# EAGLE board top (EAGLE 6.5.0)
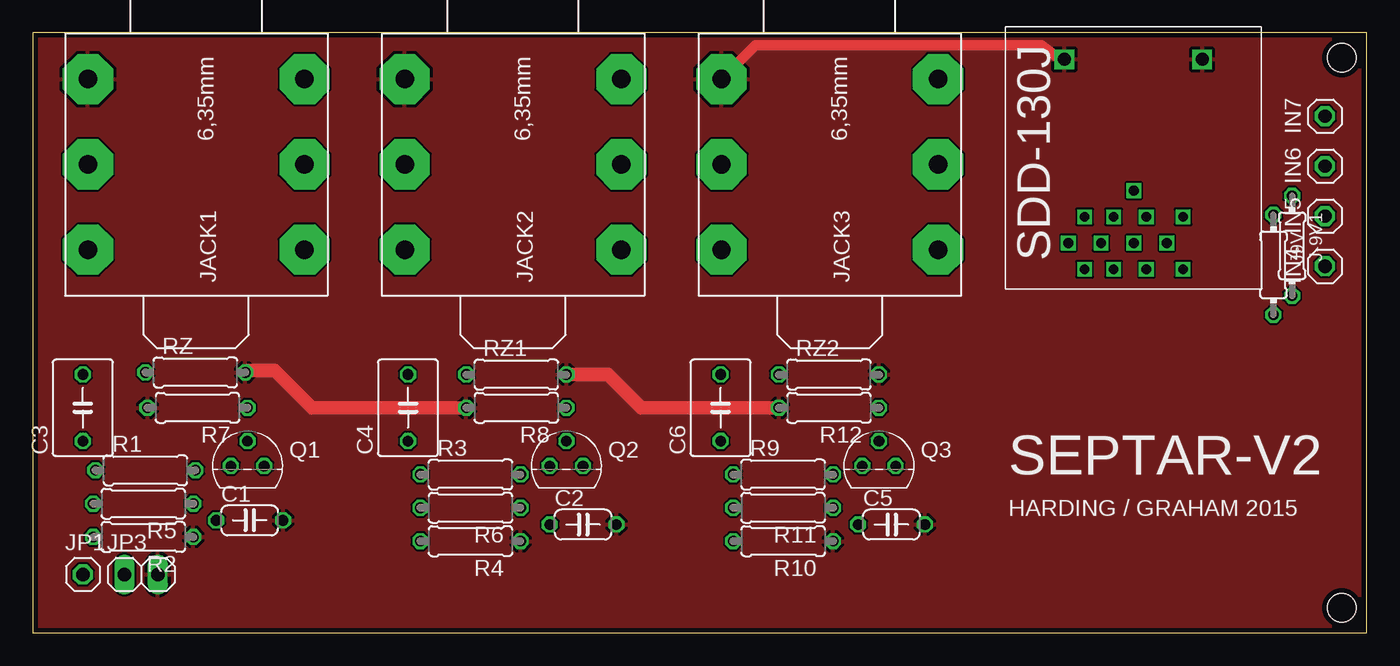
[diagram p0: board, top side]
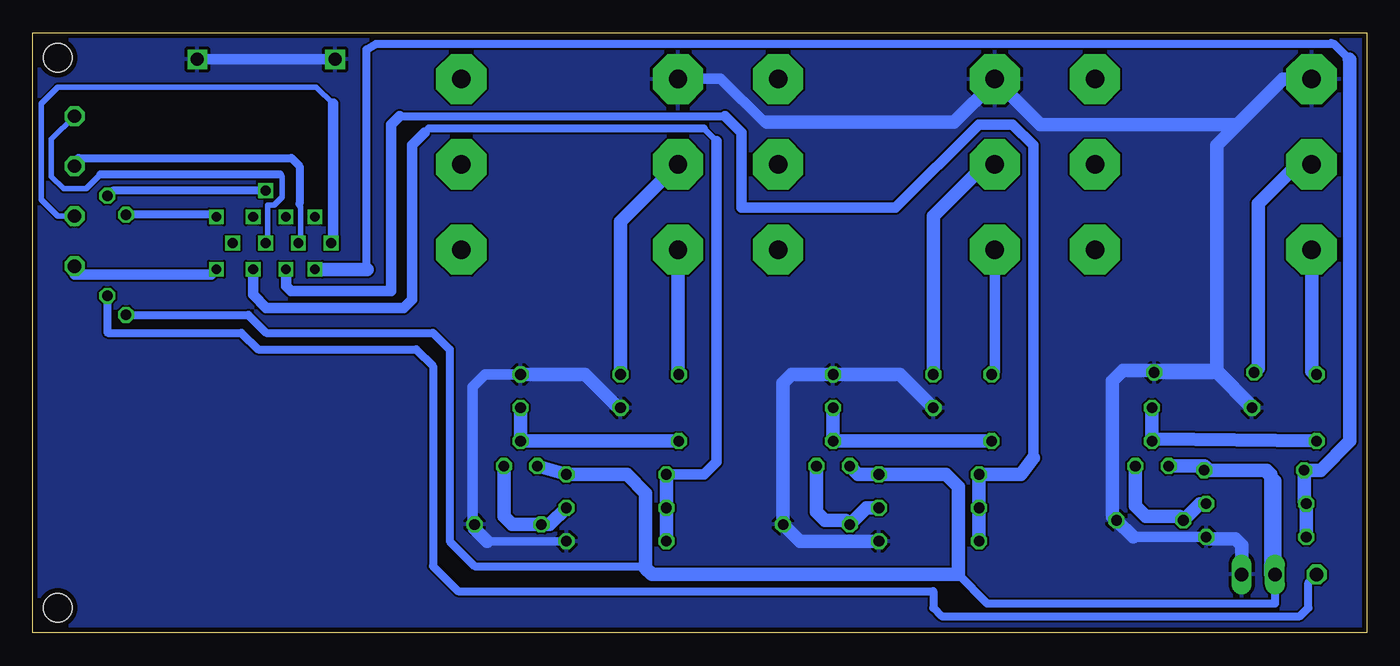
[diagram p1: board, bottom side, seen from below]

Size 101.6 x 45.72 mm. Coordinates in mm from the lower left corner, seen from the top.
Outline: 0,0 101.6,0 101.6,45.72 0,45.72 0,0
Copper layers (1*16): Top 0.0356mm / dielectric 1.5011mm / Bottom 0.0356mm
Design rules "OSHpark": minimum track width 6mil, minimum drill 13mil, track to track 6mil, track to pad 6mil, pad to pad 6mil, via to via 6mil, smd to smd 6mil, copper to edge 15mil, drill to drill 6mil, minimum pad ring 7mil, minimum via ring 7mil, stop-mask expansion 3mil, vias tented up to drill 0mil, thermal gap 10mil
Holes 2.2 mm at 99.69,1.91 99.69,43.81

## Footprints (pad centres in the part's own frame; a part is rotated, then mirrored left to right if it is on the bottom)
C050-024X044 = drill 0.813 octagon: 1 -2.54,0; 2 2.54,0
C050-045X075 = drill 0.813 octagon: 1 -2.54,0; 2 2.54,0
1X01 = drill 1.016 octagon: 1 0,0
0204/7 = drill 0.813 octagon: 1 -3.81,0; 2 3.81,0
JACK_STEREO_6.35MM = drill 1.4 pad 3.81 octagon: 2 -6,-8.5; 3 -6,8; 4 0.5,-8.5; 5 0.5,8; 6 7,-8.5; 7 7,8
1X02 = drill 1.016 long: 1 -1.27,0; 2 1.27,0
TO92 = drill 0.813 octagon: 1 1.27,0; 2 0,1.905; 3 -1.27,0
0207/7 = drill 0.813 octagon: 1 -3.81,0; 2 3.81,0
DIN-13 = drill 1 square: M1 -5.25,7.5; M2 5.25,7.5 | drill 0.75 square: PIN1 -3.7,-8.5; PIN2 -1.5,-8.5; PIN3 1,-8.5; PIN4 3.8,-8.5; PIN5 -4.95,-6.5; PIN6 -2.45,-6.5; PIN7 0.05,-6.5; PIN8 2.55,-6.5; PIN9 -3.7,-4.5; PIN10 -1.5,-4.5; PIN11 1,-4.5; PIN12 3.8,-4.5; PIN13 0.05,-2.5

## Placement (x,y rotation side)
C1  82pf  [C050-024X044]  16.51,8.57 0 top
C2  82pf  [C050-024X044]  41.91,8.26 0 top
C3  1uF  [C050-045X075]  3.81,17.15 90 top
C4  1uF  [C050-045X075]  28.57,17.15 90 top
C5  82pf  [C050-024X044]  65.41,8.26 0 top
C6  1uF  [C050-045X075]  52.39,17.15 90 top
IN4  [1X01]  98.42,27.94 90 top
IN5  [1X01]  98.42,31.75 90 top
IN6  [1X01]  98.42,35.56 90 top
IN7  [1X01]  98.42,39.37 90 top
J9V  0R  [0204/7]  94.5,28.04 270 top
J-9V1  0R  [0204/7]  95.92,29.49 270 top
JACK1  JACK_STEREO_6.35MM  [JACK_STEREO_6.35MM]  12.7,36.2 270 top
JACK2  JACK_STEREO_6.35MM  [JACK_STEREO_6.35MM]  36.83,36.2 270 top
JACK3  JACK_STEREO_6.35MM  [JACK_STEREO_6.35MM]  60.96,36.2 270 top
JP1  -9v  [1X01]  3.81,4.45 0 top
JP3  9v  [1X02]  8.26,4.45 0 top
Q1  J201  [TO92]  16.35,12.7 0 top
Q2  J201  [TO92]  40.64,12.7 0 top
Q3  J201  [TO92]  64.45,12.7 0 top
R1  2m2  [0207/7]  8.57,12.38 0 top
R2  2m2  [0207/7]  8.41,7.3 180 top
R3  2m2  [0207/7]  33.34,12.07 0 top
R4  2m2  [0207/7]  33.34,6.98 180 top
R5  10k  [0207/7]  8.41,9.84 180 top
R6  10k  [0207/7]  33.34,9.53 180 top
R7  3k  [0207/7]  12.54,17.15 180 top
R8  3k  [0207/7]  36.83,17.15 180 top
R9  2m2  [0207/7]  57.15,12.07 0 top
R10  2m2  [0207/7]  57.15,6.98 180 top
R11  10k  [0207/7]  57.15,9.53 180 top
R12  3k  [0207/7]  60.64,17.15 180 top
RZ  560r  [0207/7]  12.38,19.84 0 top
RZ1  560r  [0207/7]  36.83,19.69 0 top
RZ2  560r  [0207/7]  60.64,19.69 0 top
U$1  13-DIN13PINDIN  [DIN-13]  83.82,36.2 0 top

## Library data of the parts
C1-C6 J9V J-9V1 R1-R12 RZ RZ1 RZ2 = rcl
IN4-IN7 JP1 JP3 = pinhead
JACK1-JACK3 = jack_6.35mm_mine
Q1-Q3 = transistor-fet
U$1 = 13PINDIN

## Nets
GND: C1.2 C2.2 C5.2 JACK1.2 JACK2.2 JACK3.2 JP3.2 R2.1 R4.1 R7.2 R8.2 R10.1 R12.2 RZ1.2 RZ2.2 RZ.2 U$1.M1 U$1.M2
INPUT1: R1.1 R2.2 R5.2 U$1.PIN1
INPUT2: R3.1 R4.2 R6.2 U$1.PIN2
INPUT3: R9.1 R10.2 R11.2 U$1.PIN3
N$1: IN4.1 U$1.PIN4
N$2: C1.1 Q1.1 R5.1
N$3: C3.1 Q1.2 R7.1
N$4: C5.1 Q3.1 R11.1
N$5: C3.2 JACK1.6
N$6: JACK1.4 RZ.1
N$7: C2.1 Q2.1 R6.1
N$8: C4.1 Q2.2 R8.1
N$9: IN5.1 U$1.PIN5
N$10: C4.2 JACK2.6
N$11: JACK2.4 RZ1.1
N$12: IN6.1 U$1.PIN6
N$13: C6.1 Q3.2 R12.1
N$14: C6.2 JACK3.6
N$15: JACK3.4 RZ2.1
N$16: IN7.1 U$1.PIN7
N$17: J9V.1 U$1.PIN12
N$18: J-9V1.2 JP1.1
N$19: J-9V1.1 U$1.PIN13
VCC: J9V.2 JP3.1 Q1.3 Q2.3 Q3.3 R1.2 R3.2 R9.2

## Tracks (layer width: path | path; a pad name or v marks a point on that pad's centre or on a via)
GND
  Top 0.813: U$1.M1 78.22,43.7 76.83,44.77 55.03,44.77 JACK3.2
  Top 1.016: R8.2 21.27,17.15 18.41,20 16.35,20 RZ.2 | R12.2 46.35,17.15 43.81,19.69 RZ1.2
  Bottom 0.61: 66.99,6.98 R10.1 66.83,6.98 68.1,8.26
  Bottom 0.813: R2.1 17.78,7.3 | 45.67,38.89 45.88,38.89 49.21,42.23 52.43,42.23 JACK3.2 | 68.1,8.26 68.1,18.73 67.15,19.69 RZ2.2 | U$1.M1 U$1.M2
  Bottom 1.016: JACK1.2 6.38,42.2 9.84,38.73 | 9.84,38.73 24.87,38.73 JACK2.2 28.33,42 31.43,38.89 45.67,38.89 | RZ.2 11.43,19.84 R7.2 8.73,17.3 11.43,20 | 17.78,7.3 C1.2 19.37,8.89 19.37,19.21 18.57,20 11.43,20 | JP3.2 9.53,6.67 10,7.14 12.06,7.14 R2.1 | 11.43,20 11.43,37.15 9.84,38.73 | R8.2 35.56,19.69 RZ1.2 43.81,19.69 44.45,19.05 C2.2 43.18,6.98 R4.1 | R12.2 56.99,17.15 59.53,19.69 RZ2.2 | C5.2 67.94,7.94 66.99,6.98
  pour Top: 0,45.72 0,0 101.6,0 101.6,45.72
  pour Bottom: 0,45.72 0,0 101.6,0 101.6,45.72
INPUT1
  Bottom 0.61: 2.65,44.89 75.45,44.89 76.2,44.45 76.2,27.77 | 2.5,44.89 1.33,43.71 1.33,43.72 2.49,44.89 2.5,44.89 | 2.5,44.89 2.65,44.89 | 2.7,44.93 2.7,44.94 2.65,44.89
  Bottom 0.813: 76.2,27.77 76.13,27.7
  Bottom 1.016: U$1.PIN1 76.13,27.7 | 1.33,43.71 1.27,43.66 1.27,14.61 3.49,12.38 R1.1 4.76,10 R5.2 R2.2
INPUT2
  Bottom 0.61: 73.66,39.37 48.9,39.37
  Bottom 0.813: U$1.PIN2 82.32,26.44 81.92,26.04 74.3,26.04 74.3,38.73 73.66,39.37 | 48.9,39.37 47.62,38.1 47.62,32.39 35.88,32.39 29.53,38.73 26.99,38.73 25.4,37.15 25.4,13.34
  Bottom 1.016: 25.4,13.34 26.35,12.07 R3.1 R6.2 R4.2
INPUT3
  Bottom 0.406: 71.75,38.1 71.44,38.42 | 50.48,38.42 49.53,37.47
  Bottom 0.61: 50.48,38.42 71.44,38.42
  Bottom 0.813: U$1.PIN3 84.82,25.77 83.82,24.77 73.34,24.77 72.71,25.4 72.71,37.15 71.75,38.1 | 49.53,37.47 49.53,13.02 50.48,12.07 R9.1
  Bottom 1.016: R9.1 R11.2 R10.2
N$1
  Bottom 0.406: 98.42,27.3 IN4.1
  Bottom 0.813: 98.42,27.3 88.01,27.3 U$1.PIN4
N$2
  Bottom 1.016: Q1.1 17.62,9.68 16.83,8.89 14.29,8.89 C1.1 12.7,9.84 R5.1
N$3
  Bottom 1.016: R7.1 Q1.2 16.19,14.76 C3.1
N$4
  Bottom 1.016: Q3.1 65.72,8.89 65.09,8.26 C5.1 62.23,8.26 R11.1
N$5
  Bottom 1.016: JACK1.6 4.2,19.92 C3.2
N$6
  Bottom 1.016: JACK1.4 5.26,35.7 8.26,32.7 8.26,20.16 RZ.1
N$7
  Bottom 1.016: Q2.1 41.91,9.21 41.27,8.57 39.69,8.57 C2.1 38.1,9.53 R6.1
N$8
  Bottom 1.016: R8.1 Q2.2 C4.1
N$9
  Bottom 0.406: IN5.1 99.69,31.75 100.97,33.02 100.97,40.32 99.69,41.59 80.01,41.59 78.74,40.32
  Bottom 0.813: 78.74,40.32 78.74,29.83 U$1.PIN5
N$10
  Bottom 0.813: JACK2.6 28.33,19.93 C4.2
N$11
  Bottom 1.016: RZ1.1 33.02,31.75 28.89,35.88 28.51,35.88 JACK2.4
N$12
  Bottom 0.406: 98.12,36.18 IN6.1 | 81.28,32.7 81.28,32.51 81.21,32.44 81.21,29.86 U$1.PIN6
  Bottom 0.61: 98.12,36.18 81.9,36.18 81.28,35.56 81.28,32.7
N$13
  Bottom 1.016: R12.1 Q3.2 C6.1
N$14
  Bottom 1.016: JACK3.6 52.46,19.76 C6.2
N$15
  Bottom 1.016: RZ2.1 56.83,31.32 JACK3.4
N$16
  Bottom 0.406: U$1.PIN7 83.7,29.7 83.7,32.59 83.23,32.59 82.61,33.22 82.61,34.77 82.77,34.93 | 96.46,34.93 97.55,33.84 99.26,33.84 100.19,34.77 100.19,37.61 IN7.1
  Bottom 0.61: 82.77,34.93 96.46,34.93
N$17
  Bottom 0.61: J9V.1 87.78,31.85 U$1.PIN12
N$18
  Bottom 0.61: J-9V1.2 95.92,22.9 95.89,22.86 85.72,22.86 84.45,21.59 72.39,21.59 71.12,20.32 71.12,5.08 69.22,3.18 33.02,3.18 33.02,1.91 32.38,1.27 5.08,1.27 4.45,1.91 4.45,3.81 JP1.1
N$19
  Bottom 0.61: U$1.PIN13 95.53,33.7 J-9V1.1
VCC
  Bottom 0.61: J9V.2 85.19,24.23 83.82,22.86 71.12,22.86 69.85,21.59 69.85,6.98 67.94,5.08 54.93,5.08 | JP3.1 7.3,4.45 | 6.99,4.13 6.99,2.22 28.89,2.22 31.11,4.45
  Bottom 1.016: 12.06,12.38 R1.2 12.7,12.7 Q1.3 12.38,12.7 12.06,12.38 | 12.06,12.38 7.78,12.38 | 7.78,12.38 6.99,11.59 6.99,5.08 6.83,4.92 6.83,4.45 JP3.1 | Q2.3 38.73,12.07 R3.2 32.07,12.07 31.11,11.11 31.11,4.45 54.45,4.45 54.93,4.92 54.93,5.08 54.93,10.64 56.36,12.07 R9.2 Q3.3 | 7.78,12.38 7.62,12.38 7.3,12.07 7.3,4.45 6.99,4.13

## Text on the board
tNames: SEPTAR-V2 | HARDING / GRAHAM 2015